# Altium PCB Sheet2.PcbDoc
Units mil, origin at the board's own origin, x right, y up, seen from the top; angles counter-clockwise.
Board outline 4975 x 2275 mil, 2 copper layers (Top Layer, Bottom Layer); 71 components, 43 nets, 281 pads, 55 vias.
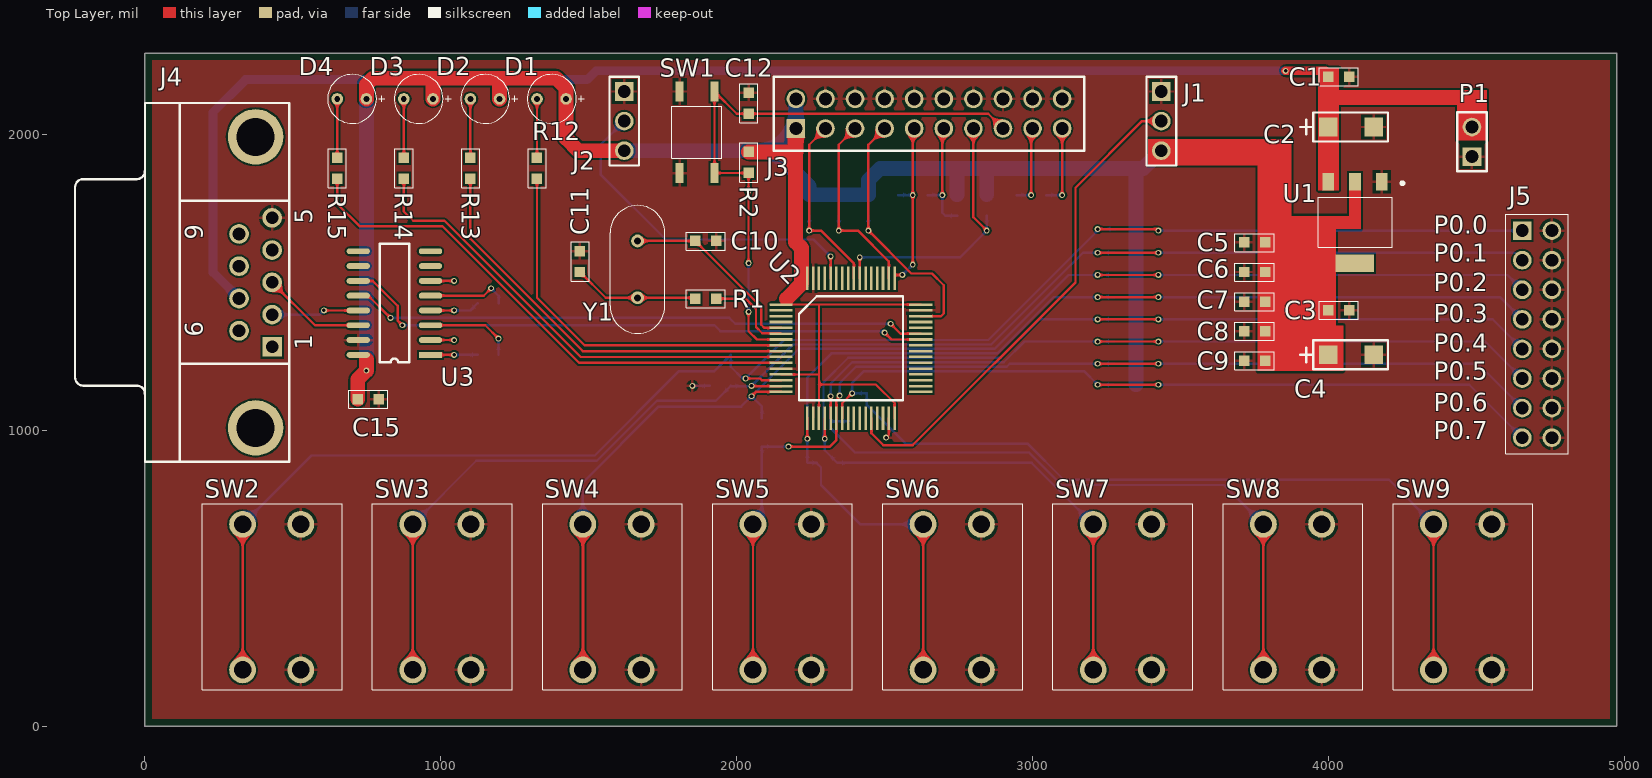
[diagram p0: Top Layer view]
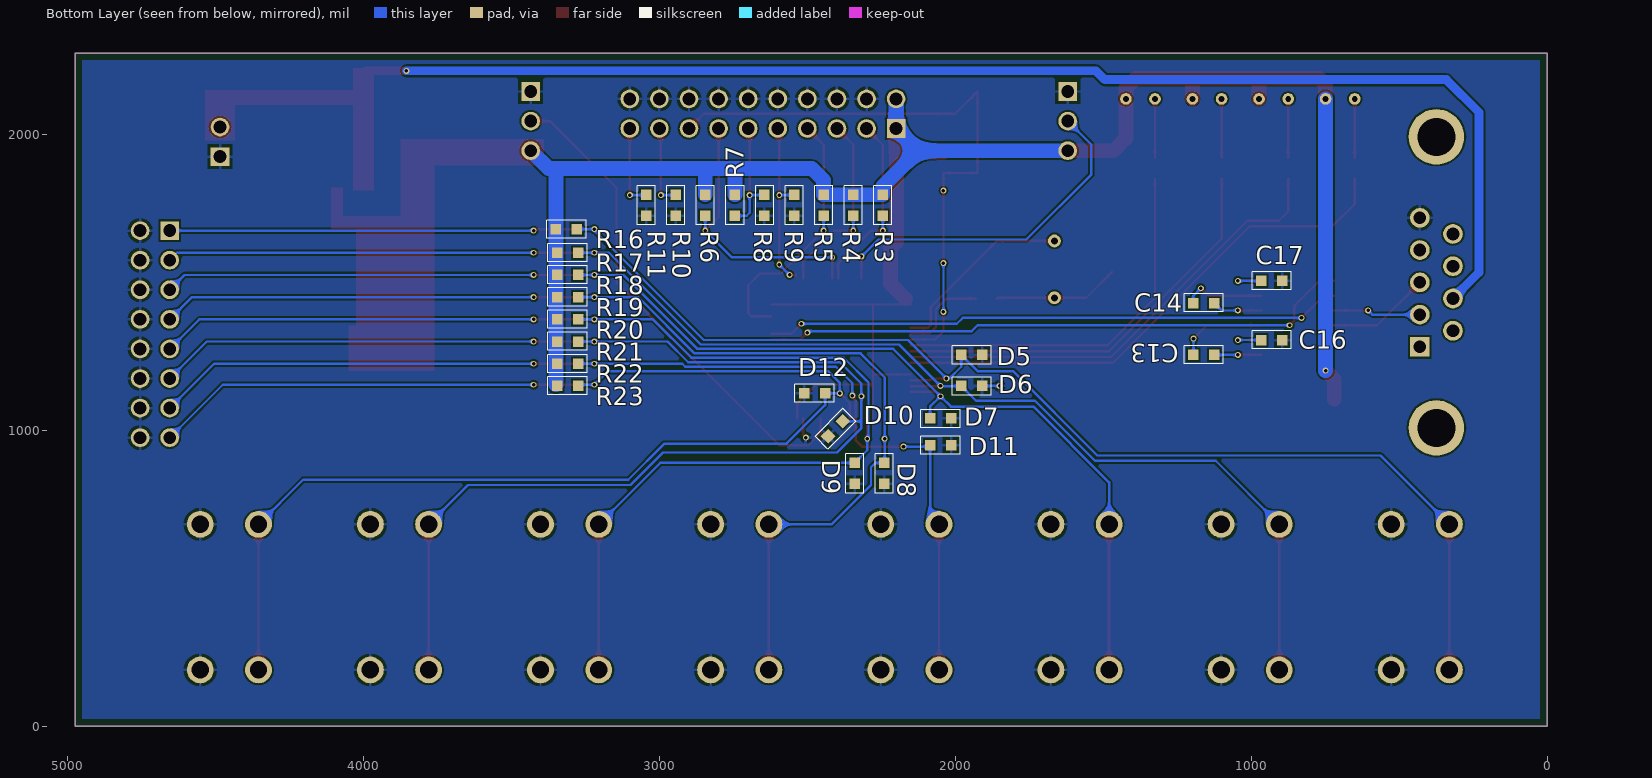
[diagram p1: Bottom Layer view, seen from below]

## Layer stack, top to bottom
Top Solder: solder mask 0.4, Solder Resist, Dk 3.5
Top Layer: signal copper 1.4
Dielectric 1: dielectric 12.6, FR-4, Dk 4.8
Bottom Layer: signal copper 1.4
Bottom Solder: solder mask 0.4, Solder Resist, Dk 3.5

## Board outline
0,0 0,2275 4975,2275 4975,0

## Design rules (kind name [scope] priority, off if disabled: settings)
Clearance [All] p1: gap=6
HoleSize [All] p1: absolutevalues=TRUE maxlimit=150 minlimit=1 maxpercent=80.000 minpercent=20.000
HoleToHoleClearance [All] p1: gap=6 allowstackedmicrovias=TRUE
MinimumSolderMaskSliver [All] p1: minsoldermaskwidth=0
PolygonConnect [All] p1: connectstyle=Relief reliefconductorwidth=10 reliefentries=4 polygonreliefangle="90 Angle" airgapwidth=10
RoutingVias [All] p1: holewidth=28 width=50 viastyle="Through Hole" minholewidth=12 minwidth=20 maxholewidth=208 maxwidth=250
SilkToSilkClearance [All] p1: silktosilkclearance=0
SolderMaskExpansion [All] p1: expansion=4
Width [All] p1: maxlimit=100 minlimit=6 preferedwidth=8
26 further rules are at their usual default settings.

## Components (designator, comment, footprint, x,y, rotation, side; value= is the part's Value field where it differs from the comment)
C1 "100PF" 0603 4070,2195 r180 top
C2 "10UF" 7343 4125,2025 r180 top
C3 "100PF" 0603 4070,1405 r180 top
C4 "10UF" 7343 4125,1255 r180 top
C5 "100nF" 0603 3715,1635 r0 top
C6 "100nF" 0603 3715,1535 r0 top
C7 "100nF" 0603 3715,1435 r0 top
C8 "100nF" 0603 3715,1335 r0 top
C9 "100nF" 0603 3715,1235 r0 top
C10 "20pF" 0603 1860,1640 r0 top
C11 "20pF" 0603 1470,1535 r90 top
C12 "100nF" 0603 2040,2070 r90 top
C13 "100nF" 0603 1125,1255 r0 bottom
C14 "100nF" 0603 1125,1430 r0 bottom
C15 "100nF" 0603 790,1105 r180 top
C16 "100nF" 0603 895,1305 r0 bottom
C17 "100nF" 0603 895,1505 r0 bottom
D1 "LED_BLUE" LED 1325,2120 r0 top
D2 "LED_BLUE" LED 1100,2120 r0 top
D3 "LED_BLUE" LED 875,2120 r0 top
D4 "LED_BLUE" LED 650,2120 r0 top
D5 "TVS*" 0603 1980,1255 r180 bottom
D6 "TVS*" 0603 1980,1150 r180 bottom
D7 "TVS*" 0603 2085,1040 r180 bottom
D8 "TVS*" 0603 2240,890 r270 bottom
D9 "TVS*" 0603 2340,890 r270 bottom
D10 "TVS*" 0603 2380,1030 r315 bottom
D11 "TVS*" 0603 2085,950 r180 bottom
D12 "TVS*" 0603 2440,1125 r0 bottom
J1 "SIP4" SIP3 3435,2145 r270 top
J2 "SIP4" SIP3 1620,2145 r270 top
J3 "JTAG" DB10X2-2.54 2200,2020 r90 top
J4 "MALE RUGHT ANGLED" DSUB1.385-2H9 0,1500 r90 top
J5 "SIP7" SIP7 4655,1675 r0 top
P1 "SIP2" SIP2 4485,2025 r270 top
R1 "390R" 0603 1860,1445 r0 top
R2 "10K" 0603 2040,1870 r90 top
R3 "10K" 0603 2245,1725 r90 bottom
R4 "10K" 0603 2345,1725 r90 bottom
R5 "10K" 0603 2445,1725 r90 bottom
R6 "10K" 0603 2845,1725 r90 bottom
R7 "0R" 0603 2745,1725 r90 bottom
R8 "10K" 0603 2645,1725 r90 bottom
R9 "10K" 0603 2545,1725 r90 bottom
R10 "10K" 0603 2945,1725 r90 bottom
R11 "10K" 0603 3045,1725 r90 bottom
R12 "1K" 0603 1325,1850 r90 top
R13 "1K" 0603 1100,1850 r90 top
R14 "1K" 0603 875,1850 r90 top
R15 "1K" 0603 650,1850 r90 top
R16 "10K" 0603 3350,1680 r180 bottom
R17 "10K" 0603 3275,1600 r0 bottom
R18 "10K" 0603 3275,1525 r0 bottom
R19 "10K" 0603 3275,1450 r0 bottom
R20 "10K" 0603 3275,1375 r0 bottom
R21 "10K" 0603 3275,1300 r0 bottom
R22 "10K" 0603 3275,1225 r0 bottom
R23 "10K" 0603 3275,1150 r0 bottom
SW1 "INT0" SW 1925,2145 r180 top
SW2 "INT0" KEY 330,190 r90 top
SW3 "INT0" KEY 905,190 r90 top
SW4 "INT0" KEY 1480,190 r90 top
SW5 "INT0" KEY 2055,190 r90 top
SW6 "INT0" KEY 2630,190 r90 top
SW7 "INT0" KEY 3205,190 r90 top
SW8 "INT0" KEY 3780,190 r90 top
SW9 "INT0" KEY 4355,190 r90 top
U1 "LM1117" LM1117 4180,1840 r180 top
U2 "STM32F103R8T6" STM32F103R8T6 2150,1425 r0 top
U3 "SP3232E" SP3232E-SOIC 965,1255 r180 top
Y1 "8MHz" HC-49S 1665,1640 r270 top

## Footprints (in the part's own frame and the unit in brackets; to place one, negate y for a bottom-side part, rotate by r counter-clockwise, add the part's x,y. Pads: shape width x height; smd on the part's side, far side on the other; paste and mask are expansions set on the pad)
0603 [mm]
  rect 0.9x0.9 smd: 1(0,0) 2(1.8,0)
  silkscreen extent -0.79,-0.79 2.59,0.76
7343 [mm]
  rect 1.6x1.6 smd: 1(3.2,0) 2(-0.7,0)
  silkscreen extent -1.93,-1.24 5.59,1.24
DB10X2-2.54 [mm]
  rect 1.6x1.6 hole 1.1: 1(0,0)
  round 1.6 hole 1.1: 2(2.54,0) 3(0,-2.54) 4(2.54,-2.54) 5(0,-5.08) 6(2.54,-5.08) 7(0,-7.62) 8(2.54,-7.62) 9(0,-10.16) 10(2.54,-10.16) 11(0,-12.7) 12(2.54,-12.7) 13(0,-15.24) 14(2.54,-15.24) 15(0,-17.78) 16(2.54,-17.78) 17(0,-20.32) 18(2.54,-20.32) 19(0,-22.86) 20(2.54,-22.86)
  silkscreen extent -1.91,-24.77 4.45,1.91
DSUB1.385-2H9 [mm] "Connector; D Subminiature; 9 Position; Right Angle; Pitch 1.385 mm"
  rect 1.69x1.69 hole 1.09: 1(-5.54,-10.92)
  round 1.69 hole 1.09: 2(-2.77,-10.92) 3(0,-10.92) 4(2.77,-10.92) 5(5.54,-10.92) 6(-4.155,-8.08) 7(-1.385,-8.08) 8(1.385,-8.08) 9(4.155,-8.08)
  round 4.76 hole 3.26: 10(-12.495,-9.5) 11(12.495,-9.5)
  silkscreen extent -15.4,-12.4 15.4,6
HC-49S [mm]
  round 1.1 hole 0.6: 1(0,0) 2(4.88,0)
  silkscreen extent -3.05,-2.35 7.93,2.35
KEY [mm]
  round 2.3 hole 1.5: 1(0,0) 2(12.5,0) 3(0,-5) 4(12.5,-5)
  silkscreen extent -1.7,-8.54 14.27,3.46
LED [mm]
  round 1 hole 0.5: 1(0,0) 2(2.5,0)
  silkscreen extent -0.83,-2.1 4.06,2.1
LM1117 [mm]
  rect 1x1.5 smd: 1(0,0) 2(2.3,0) 3(4.6,0)
  rect 3.3x1.5 smd: 4(2.3,6.98)
  silkscreen extent -1.91,0 5.46,5.64
SIP2 [mm]
  round 1.6 hole 1.1: 1(0,0)
  rect 1.6x1.6 hole 1.1: 2(2.54,0)
  silkscreen extent -1.27,-1.27 3.81,1.27
SIP3 [mm]
  rect 1.6x1.6 hole 1.1: 1(0,0)
  round 1.6 hole 1.1: 2(2.54,0) 3(5.08,0)
  silkscreen extent -1.27,-1.27 6.35,1.27
SIP7 [mm]
  rect 1.6x1.6 hole 1.1: 1(0,0)
  round 1.6 hole 1.1: 2(2.54,0) 3(0,-2.54) 4(2.54,-2.54) 5(0,-5.08) 6(2.54,-5.08) 7(0,-7.62) 8(2.54,-7.62) 9(0,-10.16) 10(2.54,-10.16) 11(0,-12.7) 12(2.54,-12.7) 13(0,-15.24) 14(2.54,-15.24) 15(0,-17.78) 16(2.54,-17.78)
  silkscreen extent -1.4,-19.18 3.94,1.4
SP3232E-SOIC [mil]
  rect 78.74x20 smd: 1(0,0)
  oval 78.74x20 smd: 2(0,-50) 3(0,-100) 4(0,-150) 5(0,-200) 6(0,-250) 7(0,-300) 8(0,-350) 9(244.02,-350) 10(244.02,-300) 11(244.02,-250) 12(244.02,-200) 13(244.02,-150) 14(244.02,-100) 15(244.02,-50) 16(244.02,0)
  silkscreen extent 72,-375 172,25
STM32F103R8T6 [mm]
  oval 2x0.22 smd: 1(0,0)
  rect 2x0.22 smd: 2(0,-0.5) 3(0,-1) 4(0,-1.5) 5(0,-2) 6(0,-2.5) 7(0,-3) 8(0,-3.5) 9(0,-4) 10(0,-4.5) 11(0,-5) 12(0,-5.5) 13(0,-6) 14(0,-6.5) 15(0,-7) 16(0,-7.5) 33(12,-7.5) 34(12,-7) 35(12,-6.5) 36(12,-6) 37(12,-5.5) 38(12,-5) 39(12,-4.5) 40(12,-4) 41(12,-3.5) 42(12,-3) 43(12,-2.5) 44(12,-2) 45(12,-1.5) 46(12,-1) 47(12,-0.5) 48(12,0)
  rect 0.22x2 smd: 17(2.25,-9.75) 18(2.75,-9.75) 19(3.25,-9.75) 20(3.75,-9.75) 21(4.25,-9.75) 22(4.75,-9.75) 23(5.25,-9.75) 24(5.75,-9.75) 25(6.25,-9.75) 26(6.75,-9.75) 27(7.25,-9.75) 28(7.75,-9.75) 29(8.25,-9.75) 30(8.75,-9.75) 31(9.25,-9.75) 32(9.75,-9.75) 49(9.75,2.25) 50(9.25,2.25) 51(8.75,2.25) 52(8.25,2.25) 53(7.75,2.25) 54(7.25,2.25) 55(6.75,2.25) 56(6.25,2.25) 57(5.75,2.25) 58(5.25,2.25) 59(4.75,2.25) 60(4.25,2.25) 61(3.75,2.25) 62(3.25,2.25) 63(2.75,2.25) 64(2.25,2.25)
  silkscreen extent 1.54,-8.21 10.46,0.71
SW [mm]
  rect 0.7x1.75 smd: 1(0,0) 2(0,7) 3(3,0) 4(3,7)
  silkscreen extent -0.64,1.27 3.68,5.72

## Part data
C1 C3 C5 C6 C7 C8 C9 C10 C11 C12 C13 C14 C15 C16 C17: library part C
C2 C4: library part JC
D5 D6 D7 D8 D9 D10 D11 D12: library part TVS
R1 R2 R3 R4 R5 R6 R7 R8 R9 R10 R11 R12 R13 R14 R15 R16 R17 R18 R19 R20 R21 R22 R23: library part R
Y1: library part CRYSTAL

## Via types
v1: diameter 20, hole 12, Top Layer to Bottom Layer, 55 vias

## Nets (pads, with @x,y where several pads share a name; then routed paths per layer and width w, separated by ;. In a path a pad name is that pad's centre, name@x,y a point inside that pad or via, vN(x,y) a via of type N, cw(c..) or ccw(c..) an arc to the next point about the centre after c; other vN are vias at no path point)
3V3: C3.2 C4.1 C5.2 C6.2 C7.2 C8.2 C9.2 C15.2 D1.2 D2.2 D3.2 D4.2 J1.3 J2.3 J3.1 J3.2 R2.2 R3.2 R4.2 R5.2 R6.2 R7.2 R16.1 R17.2 R18.2 R19.2 R20.2 R21.2 R22.2 R23.2 U1.2 U1.4 U2.1 U2.13 U2.19 U2.32 U2.48 U2.64 U3.16 | length 7489.7
  Top Layer w8: U2.13 2276.73,1188.78 ; U2.1 U2.48 ; U2.19 2277.95,1155 ; 2277.95,1422.05 2277.95,1155 ; U2.32 2533.86,1091.14 2470,1155 2277.95,1155
  Top Layer w50: C15.2 719.13,1172.28 v1(748.43,1201.57) 748.43,1239.43 ; D4.2 748.43,2168.43 770,2190 1390,2190 1423.43,2156.57 D1.2 1423.43,1986.57 1465,1945 J2.3 ; D3.2 973.43,2188.43 ; D2.2 1198.43,2186.57 ; R2.2 2199.13,1940.87 ; 2168.58,1444.65 2218.94,1495 2218.94,1616.06 2199.13,1635.87 2199.13,1940.87 ; J3.1 2200,1940 2199.13,1940.87
  Bottom Layer w50: v1(748.43,1201.57) D4.2 ; J2.3 2125,1945 ; J3.2 J3.1 2125,1945 ; R7.2 2745,1870 ; R6.2 2845,1880 ; R23.2@3350,1154.13 3350,1675 3350,1880 3345,1885 ; J1.3 3375,1885 3345,1885 ; 2125,1945 2245,1825 R3.2 R4.2 R5.2 2445,1845 2485,1885 3345,1885
5V: C1.2 C2.1 J4.7 P1.1 U1.3 | length 4484
  Top Layer w30: v1(3855,2215) 3990,2215
  Bottom Layer w30: J4.7 230,1533.58 230,2075 340,2185 1495,2185 1525,2215 v1(3855,2215)
GND: C1.1 C2.2 C3.1 C4.2 C5.1 C6.1 C7.1 C8.1 C9.1 C10.2 C11.2 C12.2 C15.1 C16.1 C17.1 D5.2 D6.2 D7.2 D8.2 D9.2 D10.2 D11.2 D12.2 J1.1 J2.1 J3.4 J3.6 J3.8 J3.10 J3.12 J3.14 J3.16 J3.18 J3.20 J4.5 J5.2 J5.4 J5.6 J5.8 J5.10 J5.12 J5.14 J5.16 P1.2 R8.1 R9.1 R10.1 R11.1 SW1.3 SW1.4 SW2.3 SW2.4 SW3.3 SW3.4 SW4.3 SW4.4 SW5.3 SW5.4 SW6.3 SW6.4 SW7.3 SW7.4 SW8.3 SW8.4 SW9.3 SW9.4 U1.1 U2.12 U2.18 U2.31 U2.47 U2.63 U3.15 | length 129.1
  Top Layer w8: v1(2505,975) 2514.17,984.17 U2.31
  Bottom Layer w8: v1(1850,1150) D6.2
LED1: R12.1 U2.8 | length 1293.7
  Top Layer w8: R12.1 1325,1447.84 1485.63,1287.2 U2.8
LED2: R13.1 U2.9 | length 1410
  Top Layer w8: R13.1 1100,1647.38 1479.86,1267.52 U2.9
LED3: R14.1 U2.10 | length 1589.7
  Top Layer w8: R14.1 875,1740 907,1708 1012.46,1708 1472.62,1247.84 U2.10 U2.10@2149.39,1247.22
LED4: R15.1 U2.11 | length 1807.4
  Top Layer w8: R15.1 650,1765 725,1690 1005,1690 1466.85,1228.15 U2.11
NetC11_1: C11.1 R1.1 Y1.2 | length 427.3
  Top Layer w8: C11.1 1557.13,1447.87 Y1.2 1857.13,1447.87 R1.1
NetC13_1: C13.1 U3.1 | length 160
  Top Layer w8: U3.1 v1(1045,1255)
  Bottom Layer w8: v1(1045,1255) C13.1
NetC13_2: C13.2 U3.3 | length 304
  Top Layer w8: U3.3 1150,1355 v1(1195,1310)
  Bottom Layer w8: C13.2@1195,1255.87 v1(1195,1310) v1@1195.87,1309.13
NetC14_1: C14.1 U3.4 | length 170.4
  Top Layer w8: U3.4 v1(1045,1405)
  Bottom Layer w8: v1(1045,1405) 1100,1405 C14.1
NetC14_2: C14.2 U3.5 | length 276.1
  Top Layer w8: U3.5 1145,1455 v1(1170,1480)
  Bottom Layer w8: v1(1170,1480) 1195.87,1454.13 C14.2
NetC16_2: C16.2 U3.2 | length 159.1
  Top Layer w8: U3.2 v1(1045,1305)
  Bottom Layer w8: C16.2 v1(1045,1305)
NetC17_2: C17.2 U3.6 | length 159.1
  Top Layer w8: U3.6 v1(1045,1505)
  Bottom Layer w8: C17.2 v1(1045,1505)
NetD1_1: D1.1 R12.2 | length 199.1
  Top Layer w8: R12.2 D1.1
NetD2_1: D2.1 R13.2 | length 199.1
  Top Layer w8: R13.2 D2.1
NetD3_1: D3.1 R14.2 | length 199.1
  Top Layer w8: R14.2 D3.1
NetD4_1: D4.1 R15.2 | length 199.1
  Top Layer w8: R15.2 D4.1
NetJ1_2: J1.2 U2.28 | length 1688.7
  Top Layer w8: U2.28 2455.12,989.88 2495,950 2595,950 3145,1500 3145,1820 3370,2045 J1.2
NetJ2_2: J2.2 U2.60 | length 1179.4
  Top Layer w8: U2.60 v1(2317.32,1587.68)
  Bottom Layer w8: J2.2 1540,1965 1540,1865 1760,1645 2260,1645 v1(2317.32,1587.68)
NetJ3_11: J3.11 R7.1 R8.2 | length 390.3
  Top Layer w8: v1(2695,1795) 2695,2015 J3.11
  Bottom Layer w8: R8.2@2645.87,1795 v1(2695,1795) 2695,1735 2705,1725 R7.1
NetJ3_17: J3.17 R10.2 | length 276.2
  Top Layer w8: v1(2995,1795) 2995,2015 J3.17
  Bottom Layer w8: R10.2@2945.87,1795 v1(2995,1795)
NetJ3_19: J3.19 R11.2 | length 279.1
  Top Layer w8: v1(3100,1795) J3.19
  Bottom Layer w8: R11.2@3045.87,1795 v1(3100,1795)
OSCI: C10.1 U2.5 Y1.1 | length 641.8
  Top Layer w8: Y1.1 C10.1 2083,1417 2083,1357 2093.74,1346.26 U2.5
OSCO: R1.2 U2.6 | length 303.3
  Top Layer w8: R1.2 2029.54,1445 2065,1409.54 2065,1349.54 2086.28,1328.26 2104.5,1328.26 2104.83,1327.93 2148.65,1327.93 U2.6
P0.0: D5.1 J5.1 R16.2 SW2.1 SW2.2 U2.14 | length 5499.7
  Top Layer w8: SW2.1 SW2.2 ; v1(2030,1175) 2079.09,1175 2085,1169.09 U2.14 ; v1(3220,1680) v1@3420,1680
  Bottom Layer w8: SW2.2 562.87,915 1520,915 1805,1200 1925,1200 D5.1 1980,1215 2020,1175 v1(2030,1175) 2160,1305 2850,1305 3220,1675 v1(3220,1680) R16.2 ; v1(3425,1675) J5.1
P0.1: D6.1 J5.3 R17.1 SW3.1 SW3.2 U2.15 | length 4739.5
  Top Layer w8: SW3.1 SW3.2 ; v1@2050.59,1149.41 U2.15 ; v1(3220,1600) v1(3425,1600)
  Bottom Layer w8: SW3.2 1119.87,897 1527.46,897 1730.46,1100 1930,1100 D6.1 ; D6.1@1980.59,1149.41 2038.35,1149.41 ; v1(2050,1150) 2190,1290 2860.46,1290 3170.46,1600 v1(3220,1600) R17.1 ; v1(3425,1600) 4630,1600
P0.2: D7.1 J5.5 R18.1 SW4.1 SW4.2 U2.16 | length 4370.7
  Top Layer w8: v1(2050,1115) 2064.72,1129.72 U2.16 ; v1(3220,1525) v1(3425,1525)
  Top Layer w10: SW4.1 SW4.2
  Bottom Layer w8: SW4.2 1480,824.09 1735.91,1080 2015,1080 v1(2050,1115) ; D7.1 2085,1080 v1(2050,1115) ; R18.1 v1(3220,1525) 3120.91,1525 2870.91,1275 2210,1275 v1(2050,1115) ; v1(3425,1525) 4605,1525 J5.5
P0.3: D8.1 J5.7 R19.1 SW6.1 SW6.2 U2.17 | length 3975.2
  Top Layer w8: v1(2238.58,971.42) U2.17 ; SW6.1 SW6.2 ; v1(3220,1450) v1(3425,1450)
  Bottom Layer w8: D8.1@2238.58,891.42 v1(2238.58,971.42) 2238.58,1178.58 2320,1260 2881.37,1260 3071.37,1450 v1(3220,1450) R19.1 ; D8.1 2270,890 2285,875 2285,815 2417.87,682.13 SW6.2 ; v1(3425,1450) 4580,1450 J5.7
P0.4: D9.1 J5.9 R20.1 SW7.1 SW7.2 U2.20 | length 4349
  Top Layer w8: v1@2297.64,972.64 U2.20 ; SW7.1 SW7.2 ; v1(3220,1375) v1(3425,1375)
  Bottom Layer w8: SW7.2 2997.13,890 D9.1 2297.64,932.36 v1(2297.64,971.42) 2293.32,975.73 2293.32,1161.32 2377,1245 2891.82,1245 3021.82,1375 v1(3220,1375) R20.1 ; v1(3425,1375) 4555,1375 J5.9
P0.5: D10.1 J5.11 R21.1 SW8.1 SW8.2 U2.21 | length 4879.4
  Top Layer w8: U2.21 v1(2317.32,1115) ; v1(3220,1300) v1(3425,1300) ; SW8.1 SW8.2
  Bottom Layer w8: D10.1 2317.32,1030 ; R21.1 v1(3220,1300) 2972.28,1300 2902.28,1230 2390,1230 2317.32,1157.32 v1(2317.32,1115) 2317.32,1030 ; v1(3425,1300) 4530,1300 J5.11 ; SW8.2 3647.13,815 3097.58,815 2987.58,925 2400,925 2317.32,1007.68 2317.32,1030
P0.6: D11.1 J5.13 R22.1 SW5.1 SW5.2 U2.22 | length 3672.2
  Top Layer w8: SW5.1 SW5.2 ; v1(2175,945) 2315,945 2337.01,967.01 U2.22 2337.01,1100.74 2341.32,1105.06 2341.32,1110.26 v1(2348.03,1116.97) ; v1(3220,1225) v1(3425,1225)
  Bottom Layer w8: SW5.2 2085,712.13 D11.1@2085,945 ; D11.1@2090,945 v1(2175,945) ; v1(2348.03,1116.97) 2348.03,1160.03 2403,1215 2912.73,1215 2922.73,1225 v1(3220,1225) R22.1 ; v1(3425,1225) 4505,1225 J5.13
P0.7: D12.1 J5.15 R23.1 SW9.1 SW9.2 U2.23 | length 5221.4
  Top Layer w8: U2.23 2356.69,1091.69 v1(2390,1125) ; v1(3220,1154) v1@3424,1154 ; SW9.1 SW9.2
  Bottom Layer w8: R23.1@3271,1154 v1(3220,1154) 3174,1200 2430,1200 2390,1160 v1(2390,1125) D12.1 2440,1085 2570,955 2983.04,955 3105.04,833 4204.13,833 SW9.2 ; v1(3425,1154) 4476,1154 J5.15
PA13: J3.7 R5.1 U2.46 | length 925.9
  Top Layer w8: J3.7 2445,1965 v1(2445,1675) 2590,1530 2660,1530 2700,1490 2700,1395 2690.63,1385.63 U2.46
  Bottom Layer w8: v1(2445,1675) R5.1
PA14: J3.9 R9.2 U2.49 | length 583.2
  Top Layer w8: U2.49@2537.5,1525 v1(2560,1525) ; v1(2595,1560) v1(2595,1795) 2595,2015 J3.9
  Bottom Layer w8: R9.2@2545.87,1795 v1(2595,1795) ; v1(2560,1525) v1(2595,1560)
PA15: J3.5 R4.1 U2.50 | length 687.3
  Top Layer w8: J3.5 2345,1965 v1(2345,1675) 2410,1675 2514.17,1570.83 U2.50
  Bottom Layer w8: v1(2345,1675) R4.1
PB3: J3.13 R6.1 U2.55 | length 951.2
  Top Layer w8: U2.55 v1(2415.75,1584.25) ; J3.13 2800,1720 v1(2845,1675)
  Bottom Layer w8: v1(2415.75,1584.25) 2754.25,1584.25 v1(2845,1675) R6.1
PB4: J3.3 R3.1 U2.56 | length 665.2
  Top Layer w8: J3.3 2245,1965 v1(2245,1675) 2285,1675 2396.06,1563.94 U2.56
  Bottom Layer w8: v1(2245,1675) R3.1
RESET: C12.1 J3.15 R2.1 SW1.1 SW1.2 U2.7 | length 2074.3
  Top Layer w8: v1(2040,1400) 2040,1335 2068.11,1306.89 U2.7 ; v1(2040,1565) v1(2040,1810) R2.1 2039.41,1869.41 SW1.2 SW1.1 2000,2070 C12.1 2850,2070 J3.15
  Bottom Layer w8: v1(2040,1400) v1(2040,1565)
RS232_RX1: J4.2 U3.13 | length 296.9
  Top Layer w8: v1(605,1405) U3.13
  Bottom Layer w8: J4.2 590.94,1390.94 v1(605,1405)
RS232_TX1: J4.3 U3.14 | length 351.1
  Top Layer w8: J4.3 574.92,1355 U3.14
USA_RXD: U2.43 U3.12 | length 1954.7
  Top Layer w8: U3.12 755,1455 v1(830,1380) ; v1(2520,1360) 2553.43,1326.57 U2.43
  Bottom Layer w8: v1(830,1380) 1975,1380 1995,1360 v1(2520,1360)
USA_TXD: U2.42 U3.11 | length 2012.8
  Top Layer w8: U3.11 770,1505 854,1421 854,1371 v1(870,1355) ; v1(2500,1330) 2523.11,1306.89 U2.42
  Bottom Layer w8: v1(870,1355) 1925,1355 1945,1335 2495,1335 v1(2500,1330)
pads on no net: J4.1 J4.4 J4.6 J4.8 J4.9 J4.10 J4.11 U2.2 U2.3 U2.4 U2.24 U2.25 U2.26 U2.27 U2.29 U2.30 U2.33 U2.34 U2.35 U2.36 U2.37 U2.38 U2.39 U2.40 U2.41 U2.44 U2.45 U2.51 U2.52 U2.53 U2.54 U2.57 U2.58 U2.59 U2.61 U2.62 U3.7 U3.8 U3.9 U3.10

## Polygon pours and split planes (outlines as drawn)
GND on Top Layer "TOP Layer" (solid, remove dead copper, pour order 2): 25,25 165,25 4950,25 4950,85 4950,2250 4925,2250 25,2250
GND on Bottom Layer "Bottom Layer" (solid, remove dead copper, pour order 4): 25,25 80,25 4950,25 4950,30 4950,2250 4940,2250 25,2250

## Keep-outs
Keep-Out Layer:
  the board outline again, w3.94

## Other copper
Top Layer:
  rectangle net 5V: 3965,1810 4035,2225
  rectangle net 5V: 4035,2100 4435,2150
  rectangle net 5V: 4435,1980 4535,2150
  rectangle net 3V3: 3825,1725 3875,1985
  rectangle net 3V3: 3825,1680 4070,1725
  rectangle net 3V3: 3760,1680 3825,1985
  rectangle net 3V3: 4070,1680 4110,1820
  rectangle net 3V3: 3760,1355 4025,1680
  rectangle net 3V3: 3760,1200 4050,1355
  rectangle net 3V3: 3390,1895 3785,1985

## Silkscreen, mask and mechanical layers (free items; w line width, h text height)
Top Overlay:
  text "P0.0" at 4355,1665 h60
  text "P0.1" at 4355,1570 h60
  text "P0.2" at 4355,1470 h60
  text "P0.3" at 4355,1365 h60
  text "P0.4" at 4355,1265 h60
  text "P0.5" at 4355,1170 h60
  text "P0.6" at 4355,1065 h60
  text "P0.7" at 4355,970 h60

## Text inside footprints (layer, text, board x,y; h text height)
J4: Top Overlay "6" at 195.87,1316.73 h59.06 r90; Top Overlay "9" at 195.87,1643.9 h59.06 r90; Top Overlay "5" at 565.94,1698.43 h59.06 r90; Top Overlay "1" at 565.94,1272.05 h59.06 r90